# Altium PCB CelijePCB.PcbDoc
Units mm, origin at the board's own origin, x right, y up, seen from the top; angles counter-clockwise.
Board outline 60.32 x 60.32 mm, 2 copper layers (Top Layer, Bottom Layer); 47 components, 32 nets, 131 pads, 26 vias.
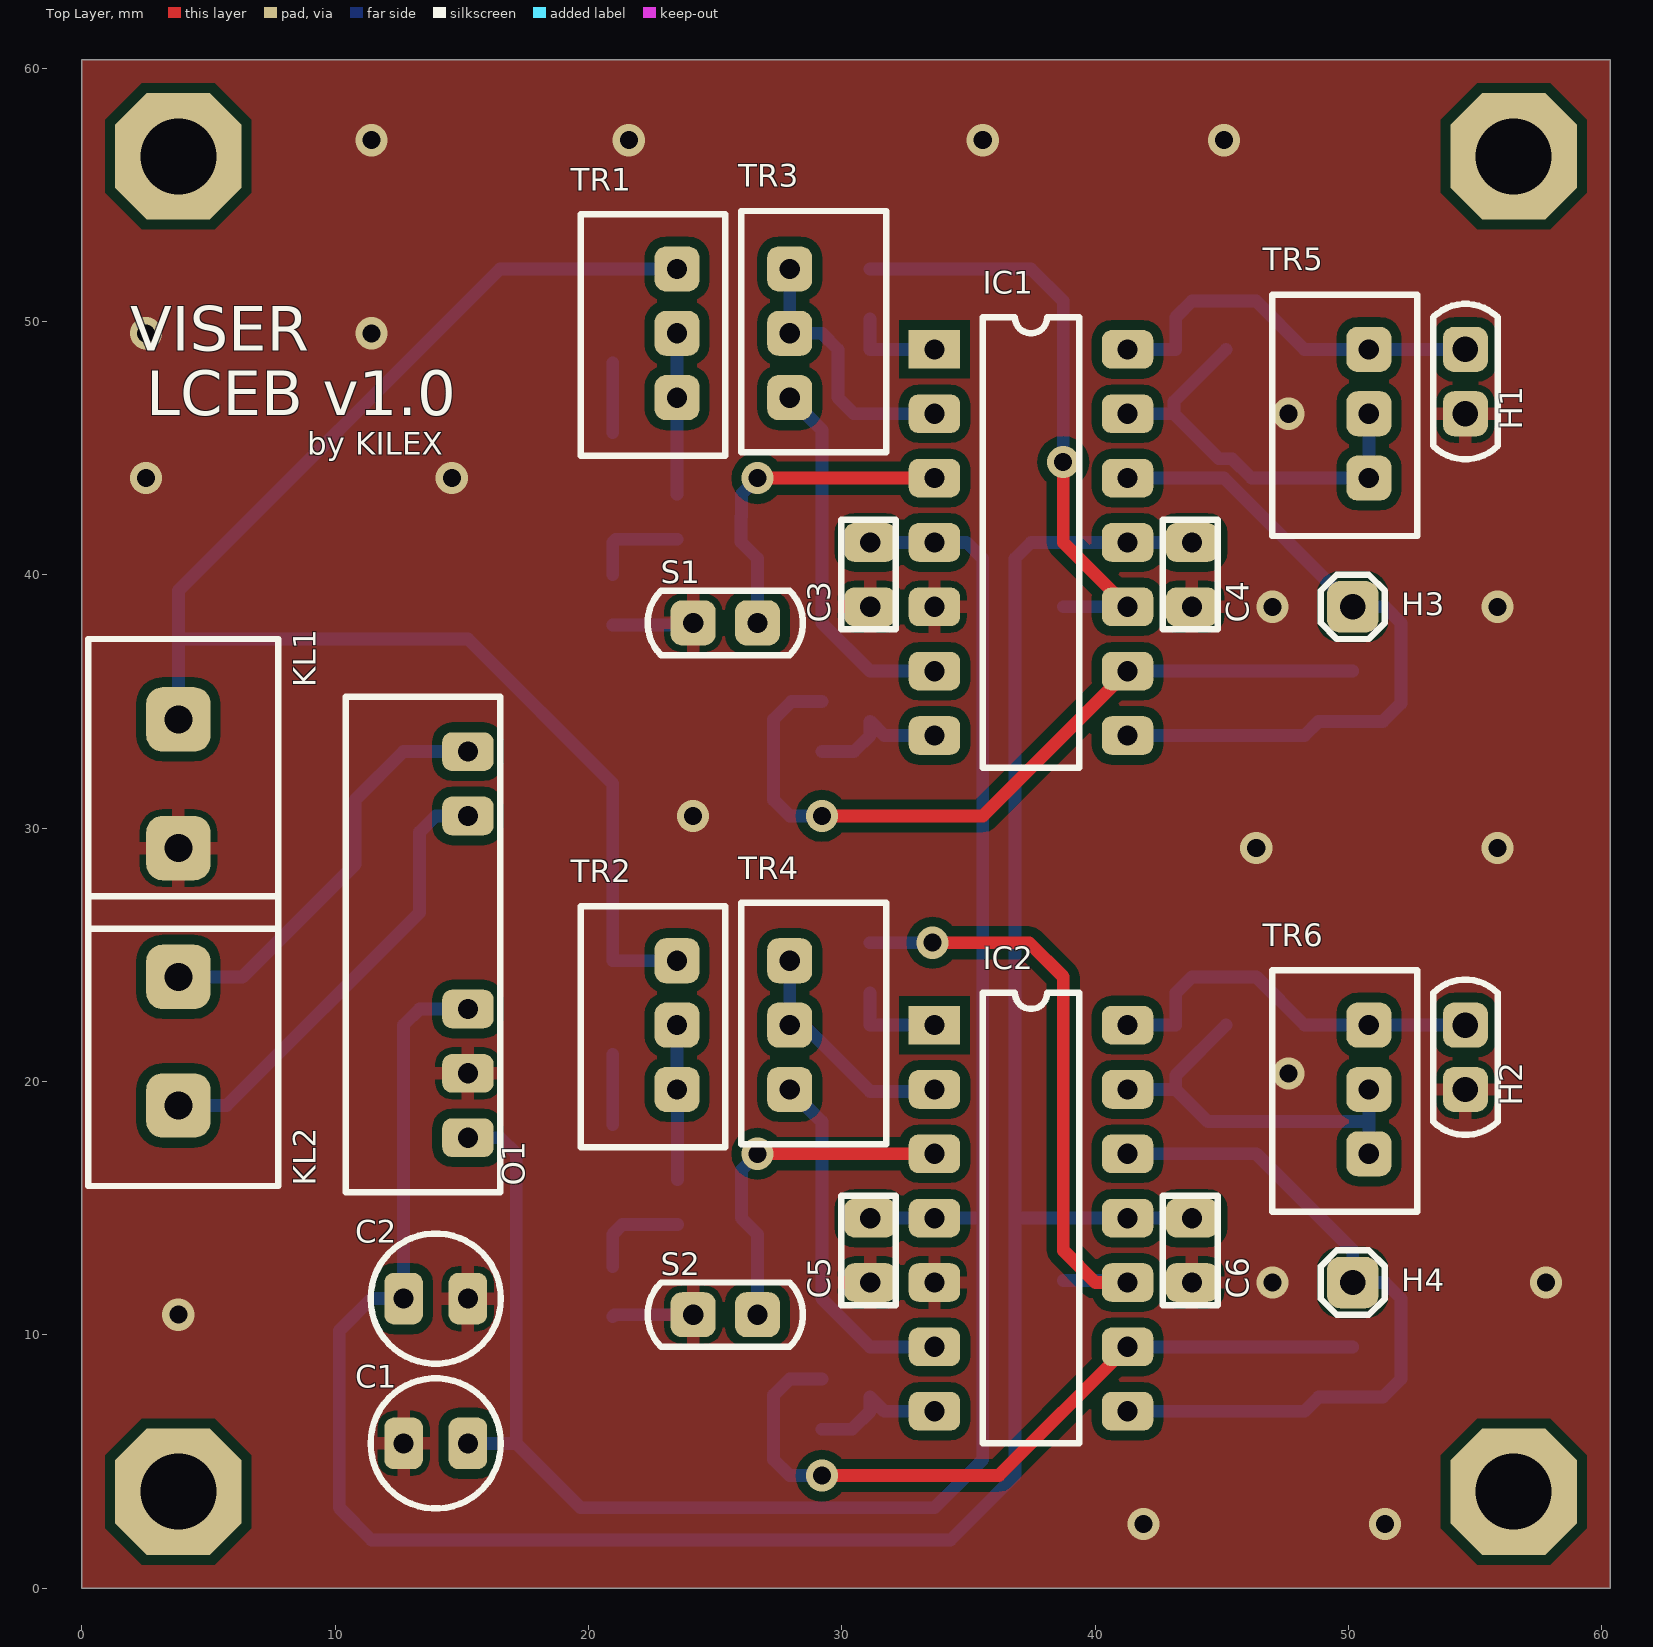
[diagram p0: Top Layer view]
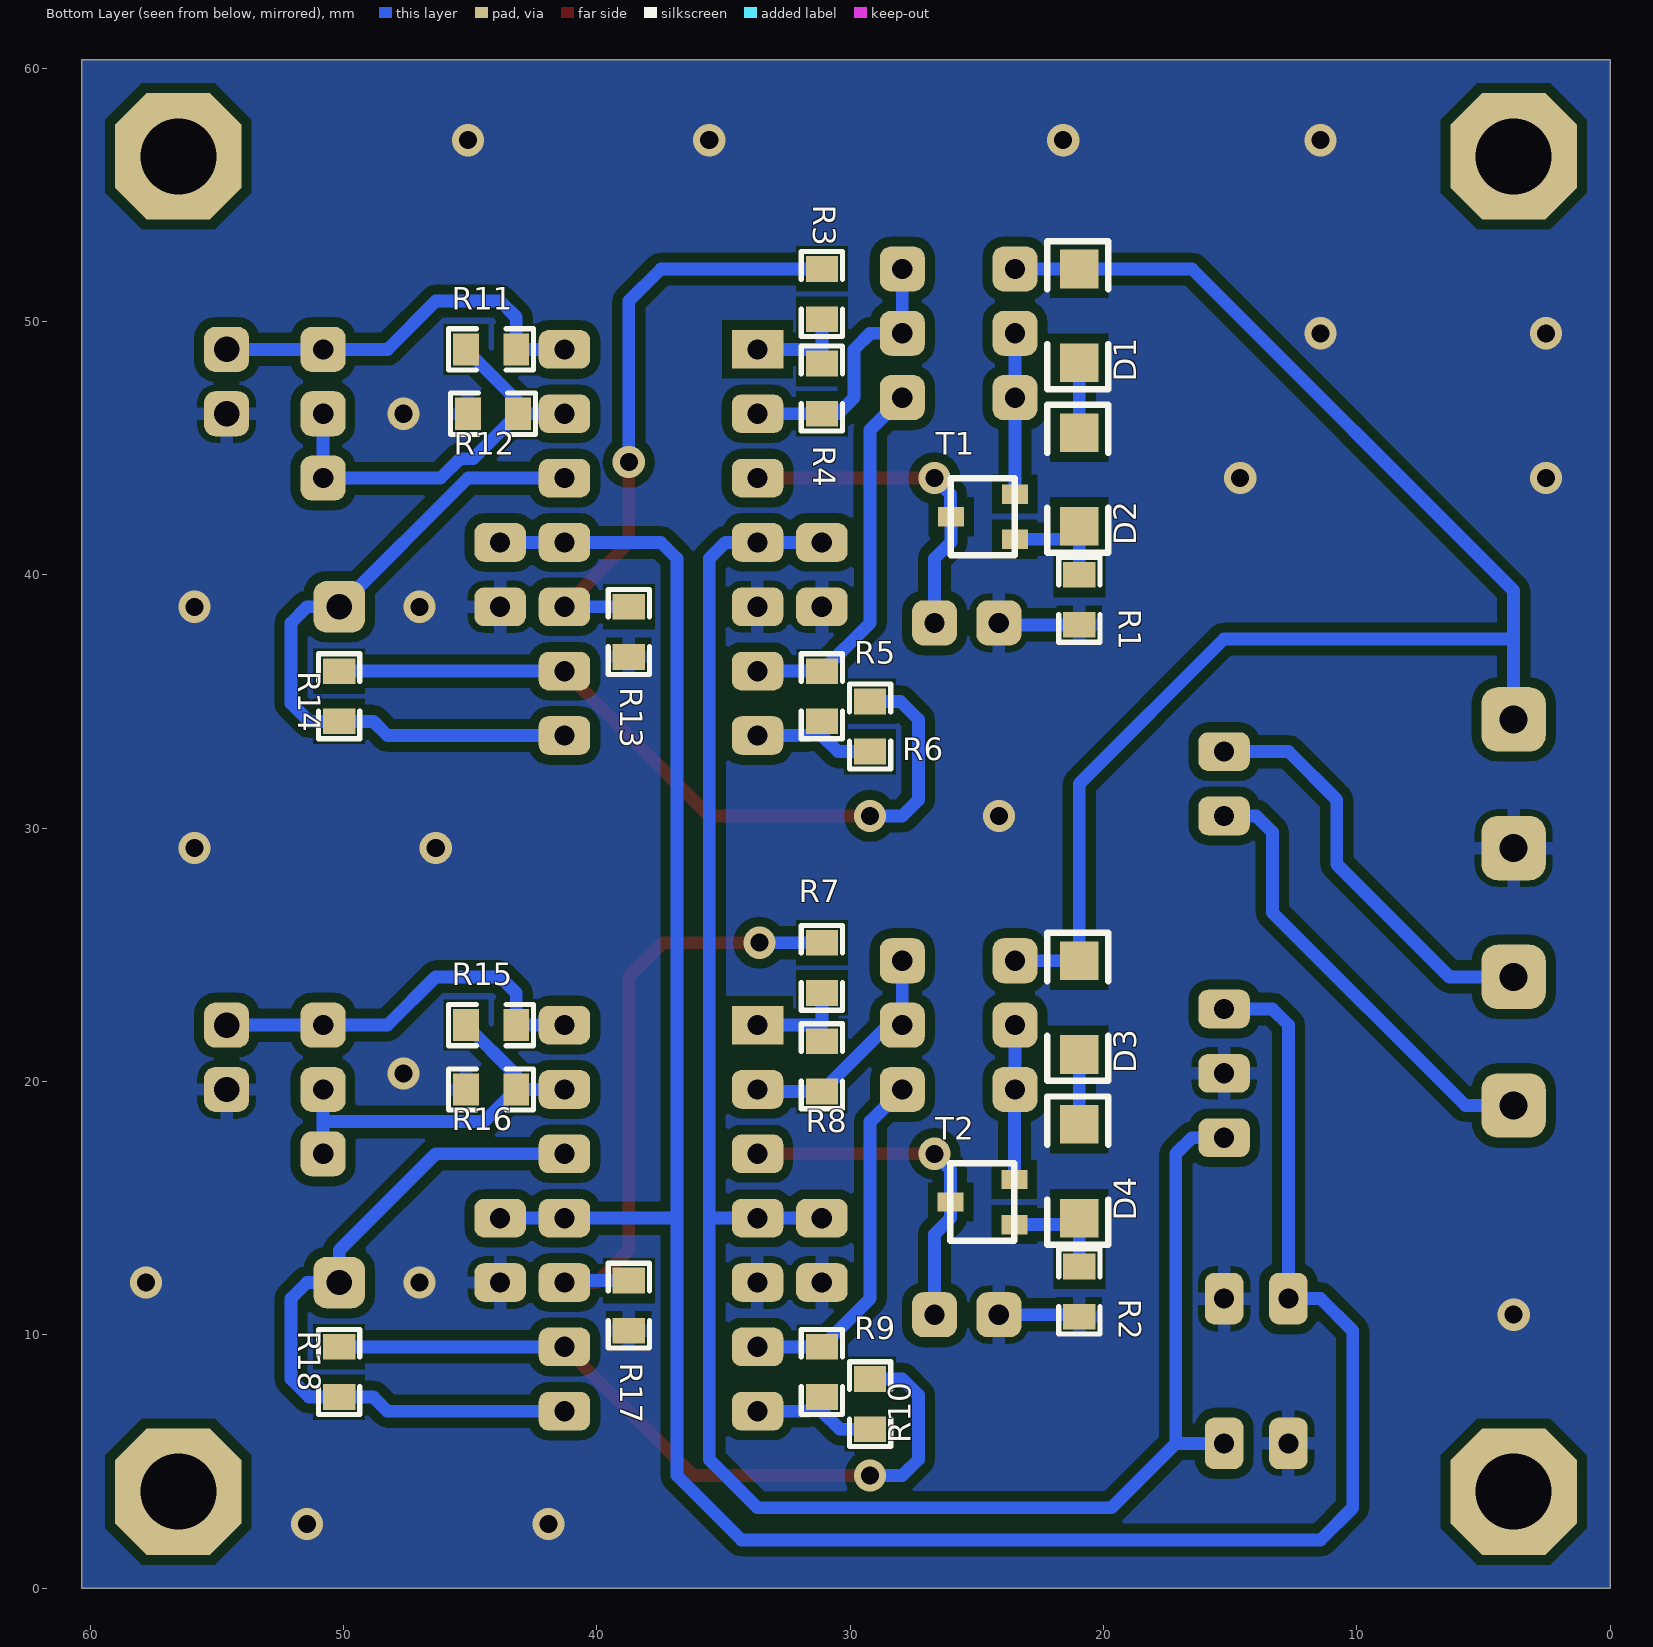
[diagram p1: Bottom Layer view, seen from below]
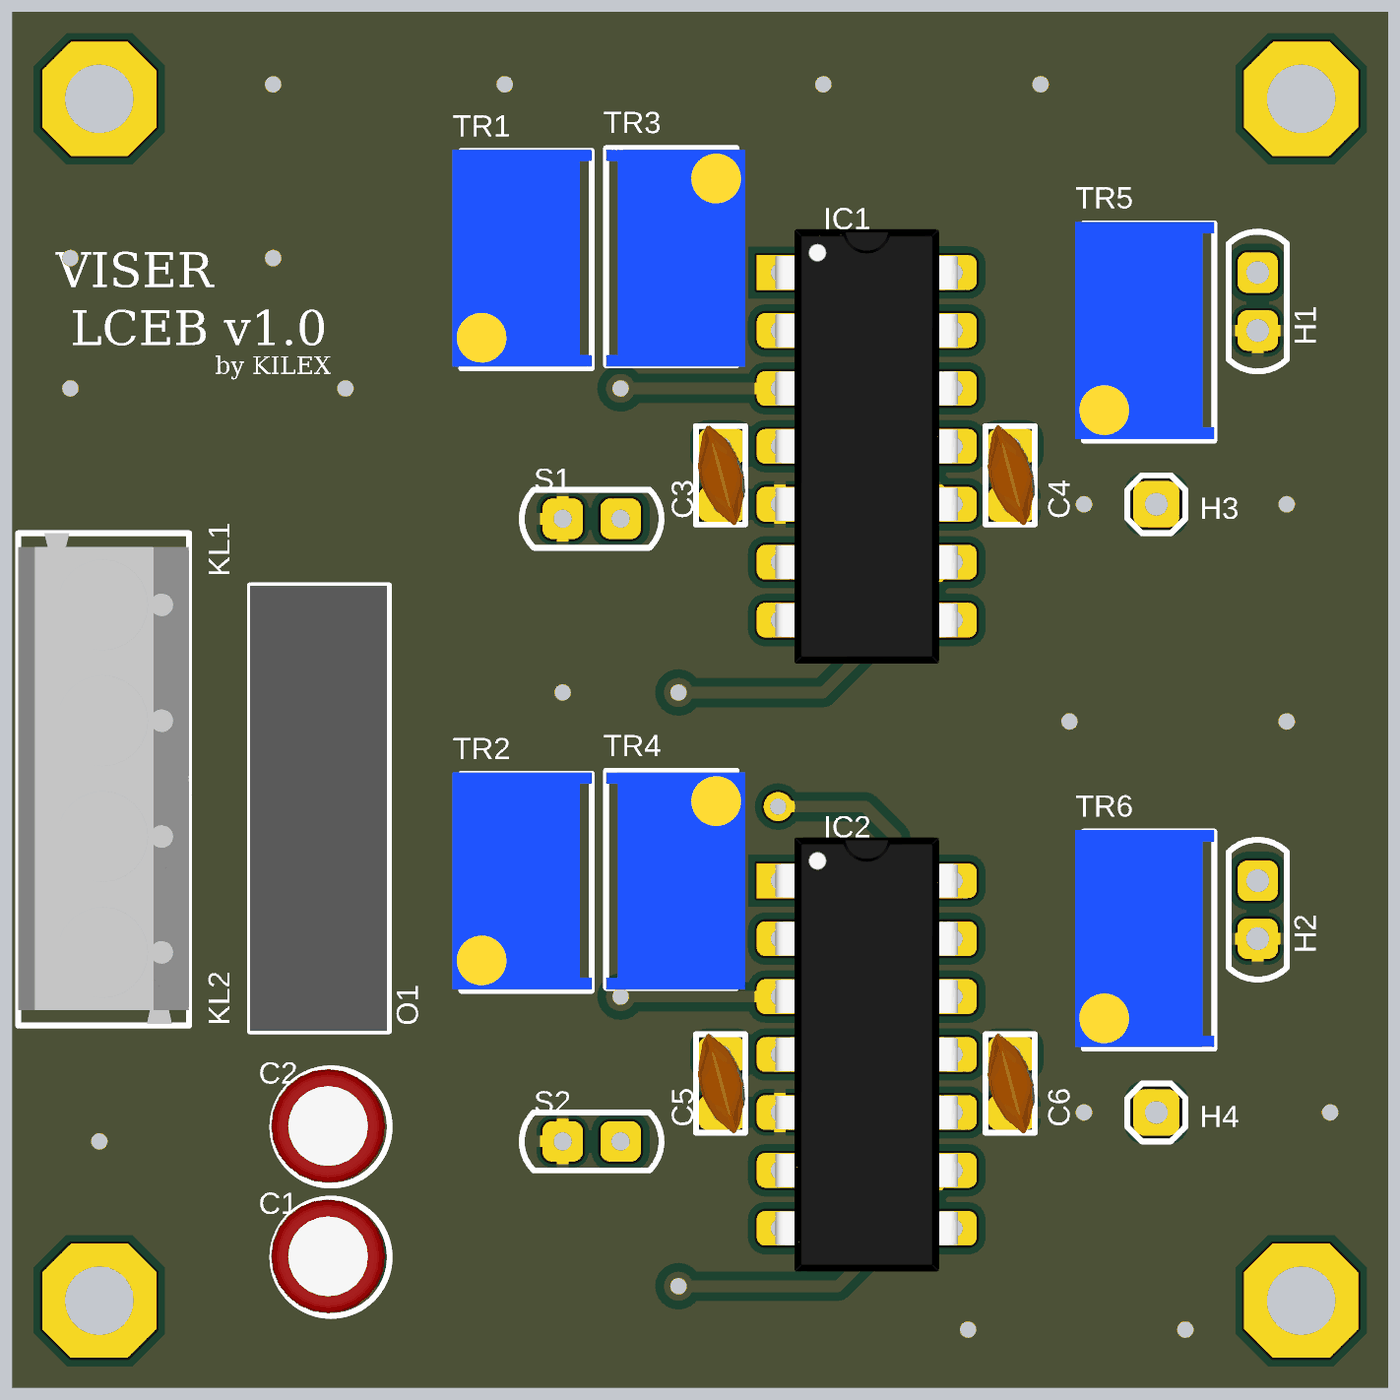
[diagram p2: 3D render of the assembled board from above, using the file's embedded part models]
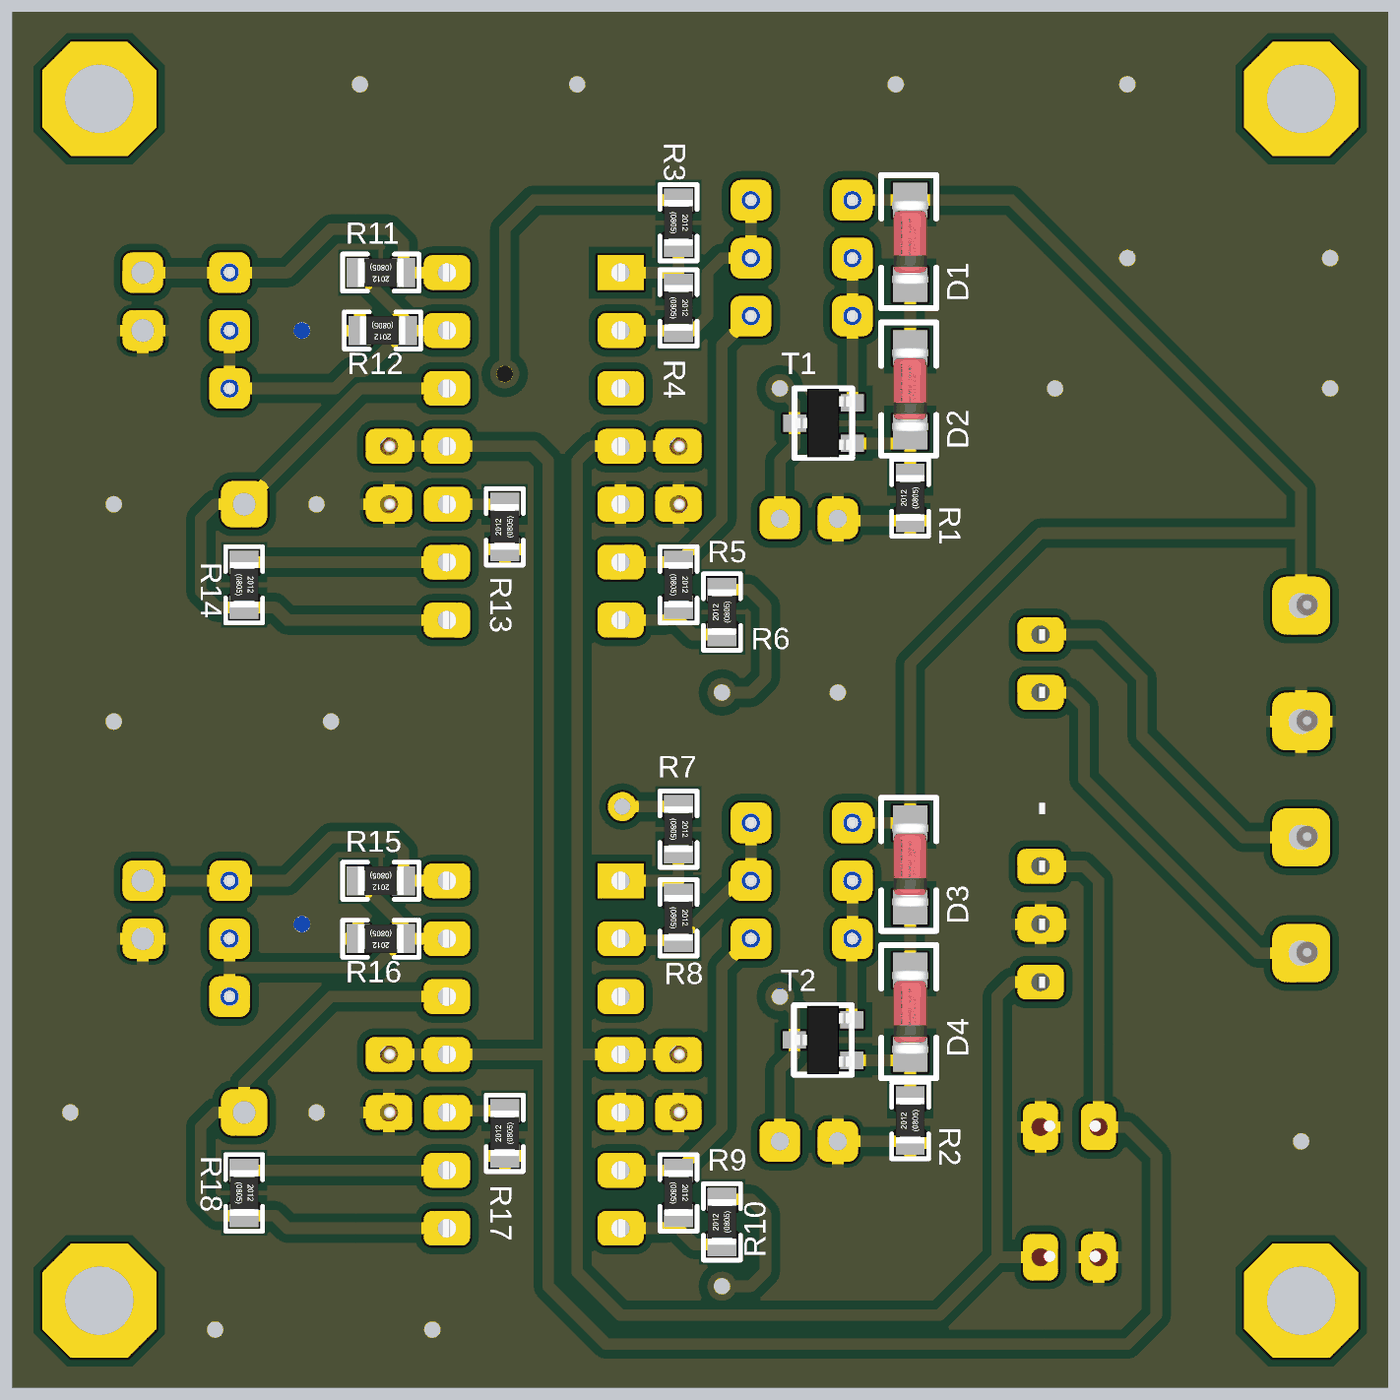
[diagram p3: 3D render of the assembled board from below, using the file's embedded part models]

## Layer stack, top to bottom
Top Solder: solder mask 0.0102, Solder Resist, Dk 3.5
Top Layer: signal copper 0.0356
Dielectric 1: dielectric 0.32, FR-4, Dk 4.8
Bottom Layer: signal copper 0.0356
Bottom Solder: solder mask 0.0102, Solder Resist, Dk 3.5

## Board outline
0,0 0,60.325 60.325,60.325 60.325,0

## Design rules (kind name [scope] priority, off if disabled: settings)
Clearance [All] p1: gap=0.381
PlaneConnect [All] p1: planeconnectstyle=Relief reliefexpansion=0.508 reliefentries=4 reliefconductorwidth=0.508 reliefairgap=0.254
PolygonConnect [All] p1: connectstyle=Relief reliefconductorwidth=0.508 reliefentries=4 polygonreliefangle="90 Angle" airgapwidth=0.254
RoutingVias [All] p1: holewidth=0.711 width=1.27 viastyle="Through Hole" minholewidth=0.711 minwidth=1.27 maxholewidth=0.711 maxwidth=1.27
SolderMaskExpansion [All] p1: expansion=0.102
Width [All] p1: maxlimit=0.762 minlimit=0.254 preferedwidth=0.508 minimp=50.000000 maximp=50.000000 favimp=50.000000
29 further rules are at their usual default settings.

## Components (designator, comment, footprint, x,y, rotation, side; value= is the part's Value field where it differs from the comment)
C1 "10uF" C2-Small 15.24,5.715 r180 top
C2 "10uF" C2-Small 15.24,11.43 r180 top
C3 "100n" C1(Ceramic)Small 31.115,38.735 r90 top
C4 "100n" C1(Ceramic)Small 43.815,38.735 r90 top
C5 "100n" C1(Ceramic)Small 31.115,12.065 r90 top
C6 "100n" C1(Ceramic)Small 43.815,12.065 r90 top
D1 "1n4148" D1(minimelf) 20.955,48.345 r90 bottom
D2 "1n4148" D1(minimelf) 20.955,41.885 r90 bottom
D3 "1n4148" D1(minimelf) 20.955,21.04 r90 bottom
D4 "1n4148" D1(minimelf) 20.955,14.58 r90 bottom
H1 "Header1x2" Header1x2#1 54.61,46.355 r90 top
H2 "Header1x2" Header1x2#1 54.61,19.685 r90 top
H3 "Test Point" H1x1 50.165,38.735 r0 top
H4 "Test Point" H1x1 50.165,12.065 r0 top
IC1 "TL064-JFET-OP" DIP14 33.655,48.895 r0 top
IC2 "TL064-JFET-OP" DIP14 33.655,22.225 r0 top
KL1 "5V" Klema 3.81,29.21 r90 top
KL2 "24V" Klema 3.81,19.05 r90 top
O1 "AIMTEC-AM1D" Aimtec-AM1D 15.24,33.02 r270 top
R1 "1K" "R 0805" 20.955,38.024 r90 bottom
R2 "1K" "R 0805" 20.955,10.719 r90 bottom
R3 "1K" "R 0805" 31.115,52.07 r270 bottom
R4 "1K" "R 0805" 31.115,48.336 r270 bottom
R5 "1K" "R 0805" 31.115,36.195 r270 bottom
R6 "1K" "R 0805" 29.21,33.02 r90 bottom
R7 "1K" "R 0805" 31.115,25.476 r270 bottom
R8 "1K" "R 0805" 31.115,21.59 r270 bottom
R9 "1K" "R 0805" 31.115,9.525 r270 bottom
R10 "1K" "R 0805" 29.21,6.274 r90 bottom
R11 "R1" "R 0805" 43.18,48.895 r0 bottom
R12 "R1" "R 0805" 43.104,46.355 r0 bottom
R13 "1K" "R 0805" 38.735,36.754 r90 bottom
R14 "1K" "R 0805" 50.165,36.195 r270 bottom
R15 "R1" "R 0805" 43.18,22.225 r0 bottom
R16 "R1" "R 0805" 43.18,19.685 r0 bottom
R17 "1K" "R 0805" 38.735,10.16 r90 bottom
R18 "1K" "R 0805" 50.165,9.525 r270 bottom
S1 "PT100" Header1x2#2 26.67,38.1 r180 top
S2 "PT100" Header1x2#2 26.67,10.795 r180 top
T1 "BC557" sot23 26.035,42.291 r270 bottom
T2 "BC557" sot23 26.055,15.24 r270 bottom
TR1 "TRIM" TRIM 23.495,52.07 r270 top
TR2 "TRIM" TRIM 23.495,24.765 r270 top
TR3 "1K" TRIM 27.94,46.99 r90 top
TR4 "1K" TRIM 27.94,19.685 r90 top
TR5 "TRIM" TRIM 50.8,48.895 r270 top
TR6 "TRIM" TRIM 50.8,22.225 r270 top

## Footprints (in the part's own frame and the unit in brackets; to place one, negate y for a bottom-side part, rotate by r counter-clockwise, add the part's x,y. Pads: shape width x height; smd on the part's side, far side on the other; paste and mask are expansions set on the pad)
Aimtec-AM1D [mil]
  rrect50% 60x80 hole 31.5: 1(0,0) 2(100,0) 3(400,0) 4(500,0) 5(600,0)
  silkscreen extent -85,-190 685,50, body extent -84,-190 684,47, height 394
C1(Ceramic)Small [mil]
  rrect50% 60x80 hole 31.5: 1(0,0) 2(100,0)
  silkscreen extent -35,-40 135,45, body extent -37,-40 137,42, height 180
C2-Small [mil]
  rrect50% 60x80 hole 31.5: 1(0,0) 2(100,0)
  silkscreen extent -51,-101 151,101, body extent -43,-100 153,97, height 433
D1(minimelf) [mil]
  rect 60x60 smd: 1(0.99,0) 2(146.66,0)
  silkscreen extent -40,-45 190,50, body extent 1,-31 147,31, height 63
DIP14 [mil]
  rect 80x60 hole 31.5: 1(0,0)
  rrect50% 80x60 hole 31.5: 2(0,-100) 3(0,-200) 4(0,-300) 5(0,-400) 6(0,-500) 7(0,-600) 8(300,-600) 9(300,-500) 10(300,-400) 11(300,-300) 12(300,-200) 13(300,-100) 14(300,0)
  silkscreen extent 75,-650 225,50, body extent -7,-675 307,75, height 159
H1x1 [mil]
  rrect50% 80x80 hole 39.37: 1(0,0)
  silkscreen extent -50,-50 50,50
Header1x2#1 [mil]
  rrect50% 70x70 hole 39.37: 1(0,0) 2(100,0)
  silkscreen extent -71,-50 171,50
Header1x2#2 [mil]
  rrect50% 70x70 hole 31.5: 1(0,0) 2(100,0)
  silkscreen extent -71,-50 171,50
Klema [mm]
  rrect50% 2.54x2.54 hole 1.1: 1(0,0) 2(5.08,0)
  silkscreen extent -3.18,-3.94 8.25,3.56, body extent -3.11,-3.94 8.25,3.56, height 9.95
"R 0805" [mil]
  rect 40x50 smd: 1(0,0) 2(78,0)
  silkscreen extent -27,-32 105,32, body extent -20,-25 98,25, height 18
sot23 [mil]
  rect 30x40 smd: 1(35,100) 2(-35,100) 3(0,0.79)
  silkscreen extent -60,0 60,100, body extent -59,1 59,99, height 42
TRIM [mil]
  rrect50% 70x70 hole 31.5: 1(0,0) 2(100,0) 3(200,0)
  silkscreen extent -85,-150 290,75, body extent -88,-165 288,75, height 465

## Part data
C1 C2: library part C2
C3 C4 C5 C6: library part C1
D1 D2 D3 D4: library part D1
H3 H4: library part H1x1
KL1 KL2: library part Klema
R1 R2 R3 R4 R5 R6 R7 R8 R9 R10 R13 R14 R17 R18: library part R1
T1 T2: library part "Transistor PNP"
TR3 TR4: library part TRIM

## Free pads (board coordinates)
  oct 5x5 hole 3: 0(3.81,3.81) 0(3.81,56.515) 0(56.515,3.81) 0(56.515,56.515)

## Via types
v1: diameter 1.27, hole 0.711, Top Layer to Bottom Layer, tented both sides, 25 vias
v2: diameter 1.27, hole 0.711, Top Layer to Bottom Layer, 1 vias

## Nets (pads, with @x,y where several pads share a name; then routed paths per layer and width w, separated by ;. In a path a pad name is that pad's centre, name@x,y a point inside that pad or via, vN(x,y) a via of type N, cw(c..) or ccw(c..) an arc to the next point about the centre after c; other vN are vias at no path point)
+5V: D1.2 D3.2 KL1.2 TR1.1 TR2.1 | length 59.1
  Bottom Layer w0.508: KL1.2 3.81,37.465 ; TR2.1 D3.2 20.955,31.75 15.24,37.465 3.81,37.465 ; TR1.1 D1.2 16.51,52.07 3.81,39.37 3.81,37.465
"+12 VCC": C1.1 C3.2 C5.2 IC1.4 IC2.4 O1.5 | length 80.5
  Bottom Layer w0.508: C1.1 17.145,5.715 ; O1.5 16.51,17.78 17.145,17.145 17.145,5.715 ; C5.2 IC2.4 35.56,14.605 ; C3.2 IC1.4 34.925,41.275 35.56,40.64 35.56,14.605 ; 17.145,5.715 19.685,3.175 33.655,3.175 35.56,5.08 35.56,14.605
+24V: KL2.2 O1.1 | length 16.6
  Bottom Layer w0.508: KL2.2 6.35,24.13 10.795,28.575 10.795,31.115 12.7,33.02 O1.1
"-12 VCC": C2.2 C4.2 C6.2 IC1.11 IC2.11 O1.3 | length 102.3
  Bottom Layer w0.508: O1.3 13.335,22.86 12.7,22.225 C2.2 11.43,11.43 10.16,10.16 10.16,3.175 11.43,1.905 34.29,1.905 36.83,4.445 36.83,14.605 ; C6.2 IC2.11 36.83,14.605 ; C4.2 IC1.11 37.465,41.275 36.83,40.64 36.83,14.605
GND: C1.2 C2.1 C3.1 C4.1 C5.1 C6.1 H1.1 H2.1 IC1.5 IC2.5 KL1.1 O1.4 R1.1 R2.1 R12.2 R13.1 R16.2 R17.1 S1.2 S2.2 | length 6.4
  Bottom Layer w0.508: R2.1 21.031,10.795 S2.2 ; R1.1 24.054,38.024 S1.2
  other v1: 41.91,2.54 51.435,2.54 3.81,10.795 46.99,12.065 57.785,12.065 47.625,20.32 46.355,29.21 55.88,29.21 24.13,30.48 46.99,38.735 55.88,38.735 2.54,43.815 14.605,43.815 47.625,46.355 2.54,49.53 11.43,49.53 11.43,57.15 21.59,57.15 35.56,57.15 45.085,57.15
GND1: KL2.1 O1.2 | length 18
  Bottom Layer w0.508: KL2.1 5.715,19.05 13.335,26.67 13.335,29.845 13.97,30.48 O1.2
NetD1_1: D1.1 D2.2 | length 2.8
  Bottom Layer w0.508: D2.2 D1.1
NetD2_1: D2.1 R1.2 T1.1 | length 3.9
  Bottom Layer w0.508: R1.2 20.955,41.275 21.082,41.402 T1.1
NetD3_1: D3.1 D4.2 | length 2.8
  Bottom Layer w0.508: D4.2 D3.1
NetD4_1: D4.1 R2.2 T2.1 | length 4
  Bottom Layer w0.508: R2.2 20.955,13.97 21.336,14.351 T2.1
NetH1_2: H1.2 IC1.14 R11.1 TR5.1 | length 15.7
  Bottom Layer w0.508: IC1.14 R11.1 43.18,50.165 43.815,50.8 46.355,50.8 48.26,48.895 TR5.1 H1.2
NetH2_2: H2.2 IC2.14 R15.1 TR6.1 | length 15.7
  Bottom Layer w0.508: IC2.14 R15.1 43.18,23.495 43.815,24.13 46.355,24.13 48.26,22.225 TR6.1 H2.2
NetH3_1: H3.1 IC1.8 IC1.12 R14.2 | length 27.7
  Bottom Layer w0.508: IC1.8 48.26,33.655 48.819,34.214 R14.2 51.359,34.214 52.07,34.925 52.07,38.1 51.435,38.735 H3.1 45.085,43.815 IC1.12
NetH4_1: H4.1 IC2.8 IC2.12 R18.2 | length 28.4
  Bottom Layer w0.508: IC2.8 48.26,6.985 48.819,7.544 R18.2 51.359,7.544 52.07,8.255 52.07,11.43 51.435,12.065 H4.1 50.165,13.335 46.355,17.145 IC2.12
NetIC1_1: IC1.1 R3.2 R4.1 | length 3.7
  Bottom Layer w0.508: R3.2 31.115,48.895 IC1.1
NetIC1_2: IC1.2 R4.2 TR3.2 TR3.3 | length 10.7
  Bottom Layer w0.508: TR3.3 TR3.2 29.21,49.53 29.845,48.895 29.845,46.99 30.48,46.355 R4.2 IC1.2
NetIC1_3: IC1.3 S1.1 T1.3 | length 13.2
  Top Layer w0.508: v1(26.67,43.815) IC1.3
  Bottom Layer w0.508: S1.1 26.67,40.64 26.015,41.295 T1.3 26.035,42.311 26.035,43.18 v1(26.67,43.815)
NetIC1_6: IC1.6 R5.1 TR3.1 | length 14.7
  Bottom Layer w0.508: TR3.1 29.21,45.72 29.21,38.1 R5.1 IC1.6
NetIC1_7: IC1.7 R5.2 R6.1 | length 5.5
  Bottom Layer w0.508: R6.1 30.48,33.02 31.115,33.655 R5.2 31.674,33.655 IC1.7
NetIC1_9: IC1.9 R6.2 R14.1 | length 30.9
  Top Layer w0.508: v1(29.21,30.48) 35.56,30.48 IC1.9
  Bottom Layer w0.508: v1(29.21,30.48) 27.94,30.48 27.305,31.115 27.305,34.29 28.016,35.001 R6.2 ; IC1.9 R14.1
NetIC1_10: IC1.10 R3.1 R13.2 | length 23.8
  Top Layer w0.508: v1(38.735,44.45) 38.735,41.275 IC1.10
  Bottom Layer w0.508: R3.1 37.465,52.07 38.735,50.8 v1(38.735,44.45) ; R13.2 IC1.10
NetIC1_13: IC1.13 R11.2 R12.1 TR5.2 TR5.3 | length 16.5
  Bottom Layer w0.508: IC1.13 R12.1 ; R11.2 43.104,46.838 R12.1 ; TR5.2 TR5.3 46.163,43.815 45.401,44.577 44.882,44.577 R12.1
NetIC2_1: IC2.1 R7.2 R8.1 | length 3.8
  Bottom Layer w0.508: R7.2 31.115,22.225 IC2.1
NetIC2_2: IC2.2 R8.2 TR4.2 TR4.3 | length 9.4
  Bottom Layer w0.508: TR4.3 TR4.2 28.499,22.225 R8.2 33.579,19.609 IC2.2
NetIC2_3: IC2.3 S2.1 T2.3 | length 13.9
  Top Layer w0.508: v1(26.67,17.145) IC2.3
  Bottom Layer w0.508: S2.1 26.67,13.97 26.035,14.605 T2.3 26.035,16.51 v1(26.67,17.145)
NetIC2_6: IC2.6 R9.1 TR4.1 | length 14
  Bottom Layer w0.508: TR4.1 29.21,18.415 29.21,11.43 R9.1 IC2.6
NetIC2_7: IC2.7 R9.2 R10.1 | length 5.5
  Bottom Layer w0.508: R10.1 30.404,6.274 31.115,6.985 R9.2 31.674,6.985 IC2.7
NetIC2_9: IC2.9 R10.2 R18.1 | length 29.9
  Top Layer w0.508: v1(29.21,4.445) 36.195,4.445 IC2.9
  Bottom Layer w0.508: v1(29.21,4.445) 27.94,4.445 27.305,5.08 27.305,7.62 27.94,8.255 R10.2 ; IC2.9 R18.1
NetIC2_10: IC2.10 R7.1 R17.2 | length 24.6
  Top Layer w0.508: v2(33.579,25.476) 37.389,25.476 38.735,24.13 38.735,13.335 40.005,12.065 IC2.10
  Bottom Layer w0.508: R7.1 v2(33.579,25.476) ; R17.2 41.199,12.141 IC2.10
NetIC2_13: IC2.13 R15.2 R16.1 TR6.2 TR6.3 | length 16
  Bottom Layer w0.508: IC2.13 R16.1 ; R15.2 43.18,20.244 R16.1 ; TR6.3 50.8,18.415 ; TR6.2 50.8,18.415 ; R16.1 44.45,18.415 50.8,18.415
NetT1_2: T1.2 TR1.2 TR1.3 | length 6.3
  Bottom Layer w0.508: T1.2 TR1.3 TR1.2
NetT2_2: T2.2 TR2.2 TR2.3 | length 6.1
  Bottom Layer w0.508: TR2.2 TR2.3 23.515,19.665 T2.2

## Polygon pours and split planes (outlines as drawn)
GND on Bottom Layer "GND" (solid, pour order 4): 0,60.325 60.325,60.325 60.325,0 0,0
GND on Top Layer "GND" (solid, pour order 6): 0,60.325 60.325,60.325 60.325,0 0,0

## Silkscreen, mask and mechanical layers (free items; w line width, h text height)
Top Overlay:
  text "VISER" at 1.905,48.26 h3
  text "LCEB v1.0" at 2.54,45.72 h3
  text "by KILEX" at 8.89,44.45 h1.52
Mechanical 1:
  the board outline again, w0.254